# EAGLE board base-2u-rgb-led-driver (EAGLE 6.2)
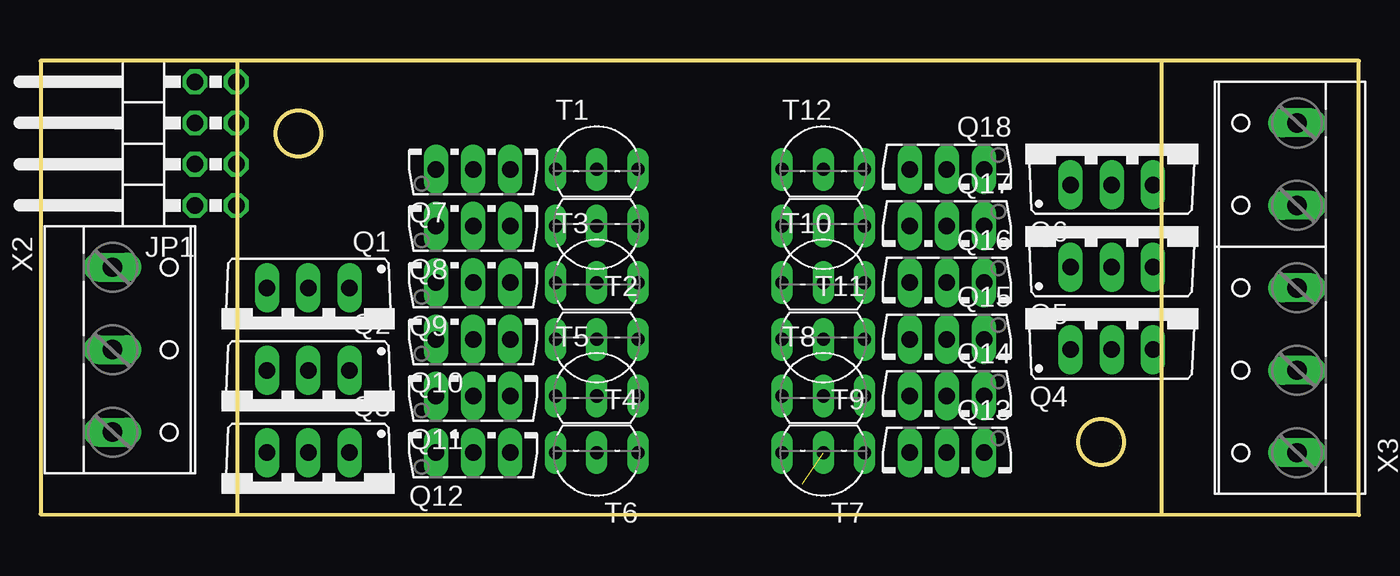
[diagram p0: board, top side]
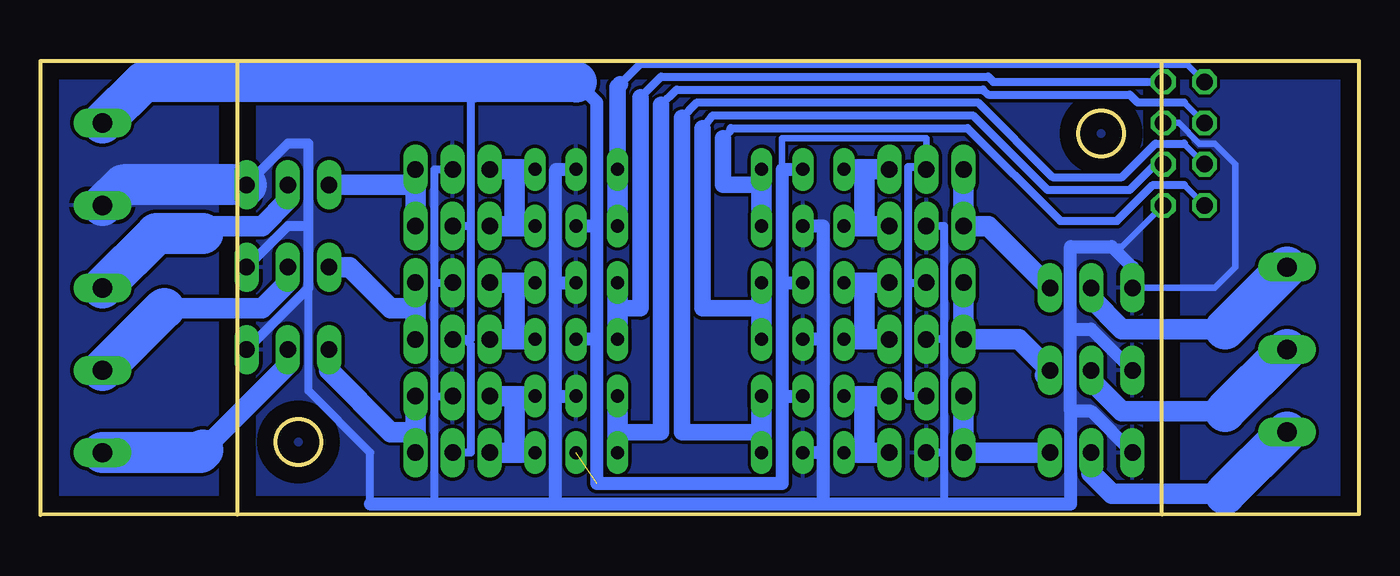
[diagram p1: board, bottom side, seen from below]

Size 81.28 x 27.98 mm. Coordinates in mm from the lower left corner, seen from the top.
Outline: 12.14,27.98 81.28,27.98 81.28,0 0,0.04 0,27.98 12.14,27.98
Outline: 12.14,0.03 12.14,27.98
Outline: 69.14,0.01 69.14,27.98
Outline: circle at 15.89,23.49 radius 1.4
Outline: circle at 65.39,4.49 radius 1.4
Copper layers (1*16): Top 0.035mm / dielectric 1.5mm / Bottom 0.035mm
Design rules: minimum track width 10mil, minimum drill 24mil, track to track 8mil, track to pad 8mil, pad to pad 8mil, via to via 8mil, smd to smd 8mil, copper to edge 40mil, drill to drill 8mil, minimum pad ring 10mil, minimum via ring 8mil, stop-mask expansion 4mil, vias tented up to drill 0mil, thermal gap 10mil

## Footprints (pad centres in the part's own frame; a part is rotated, then mirrored left to right if it is on the bottom)
2X04/90 = drill 1.016 octagon: 1 -3.81,-6.35; 2 -3.81,-3.81; 3 -1.27,-6.35; 4 -1.27,-3.81; 5 1.27,-6.35; 6 1.27,-3.81; 7 3.81,-6.35; 8 3.81,-3.81
TO220BV = drill 1.016 long: D 0,-2.54; G -2.54,-2.54; S 2.54,-2.54
TO126AV = drill 1.016 long: B 2.286,-1.27; C 0,-1.27; E -2.286,-1.27
TO92-ECB = drill 0.813 long: B 2.54,0; C 0,0; E -2.54,0
TO92-BCE = drill 0.813 long: B -2.54,0; C 0,0; E 2.54,0
W237-133 = drill 1.194 long: 1 -5.08,-0.635; 2 0,-0.635; 3 5.08,-0.635
W237-5P = drill 1.194 long: 1 -10.16,-0.635; 2 -5.08,-0.635; 3 0,-0.635; 4 5.08,-0.635; 5 10.16,-0.635

## Placement (x,y rotation side)
JP1  [2X04/90]  5.71,22.88 90 top
Q1  IRFZ44N  [TO220BV]  16.51,11.45 180 top
Q2  IRFZ44N  [TO220BV]  16.51,6.37 180 top
Q3  IRFZ44N  [TO220BV]  16.51,1.29 180 top
Q4  IRFZ44N  [TO220BV]  66.04,12.72 0 top
Q5  IRFZ44N  [TO220BV]  66.04,17.8 0 top
Q6  IRFZ44N  [TO220BV]  66.04,22.88 0 top
Q7  BD139  [TO126AV]  26.67,22.56 0 top
Q8  BD140  [TO126AV]  26.67,19.07 0 top
Q9  BD139  [TO126AV]  26.67,15.58 0 top
Q10  BD140  [TO126AV]  26.67,12.09 0 top
Q11  BD139  [TO126AV]  26.67,8.59 0 top
Q12  BD140  [TO126AV]  26.67,5.1 0 top
Q13  BD139  [TO126AV]  55.88,2.56 180 top
Q14  BD140  [TO126AV]  55.88,6.05 180 top
Q15  BD139  [TO126AV]  55.88,9.54 180 top
Q16  BD140  [TO126AV]  55.88,13.04 180 top
Q17  BD139  [TO126AV]  55.88,16.53 180 top
Q18  BD140  [TO126AV]  55.88,20.02 180 top
T1  [TO92-ECB]  34.29,21.29 0 top
T2  [TO92-BCE]  34.29,17.8 180 top
T3  [TO92-ECB]  34.29,14.31 0 top
T4  [TO92-BCE]  34.29,10.81 180 top
T5  [TO92-ECB]  34.29,7.32 0 top
T6  [TO92-BCE]  34.29,3.83 180 top
T7  [TO92-ECB]  48.26,3.83 180 top
T8  [TO92-BCE]  48.26,7.32 0 top
T9  [TO92-ECB]  48.26,10.81 180 top
T10  [TO92-BCE]  48.26,14.31 0 top
T11  [TO92-ECB]  48.26,17.8 180 top
T12  [TO92-BCE]  48.26,21.29 0 top
X2  [W237-133]  5.08,10.18 270 top
X3  [W237-5P]  76.83,13.99 90 top

## Library data of the parts
JP1 = pinhead
Q1-Q18 = transistor-power
T1-T12 = transistor
X2 X3 = con-wago-508; OC_FARNELL: unknown; OC_NEWARK: unknown

## Nets
B1: Q3.D X2.3
B2: Q6.D X3.3
DB1: Q11.B Q12.B T5.E T6.E
DB2: Q17.B Q18.B T11.E T12.E
DG1: Q9.B Q10.B T3.E T4.E
DG2: Q15.B Q16.B T9.E T10.E
DR1: Q7.B Q8.B T1.E T2.E
DR2: Q13.B Q14.B T7.E T8.E
G1: Q2.D X2.2
G2: Q5.D X3.2
GND: JP1.1 JP1.5 Q1.S Q2.S Q3.S Q4.S Q5.S Q6.S Q8.C Q10.C Q12.C Q14.C Q16.C Q18.C T2.C T4.C T6.C T8.C T10.C T12.C X3.4
IB1: JP1.4 T5.B T6.B
IB2: JP1.8 T11.B T12.B
IG1: JP1.3 T3.B T4.B
IG2: JP1.7 T9.B T10.B
IR1: JP1.2 T1.B T2.B
IR2: JP1.6 T7.B T8.B
N$1: Q1.G Q7.E Q8.E
N$2: Q4.G Q13.E Q14.E
N$3: Q2.G Q9.E Q10.E
N$5: Q3.G Q11.E Q12.E
N$7: Q5.G Q15.E Q16.E
N$8: Q6.G Q17.E Q18.E
R1: Q1.D X2.1
R2: Q4.D X3.1
VCC: Q7.C Q9.C Q11.C Q13.C Q15.C Q17.C T1.C T3.C T5.C T7.C T9.C T11.C X3.5

## Tracks (layer width: path | path; a pad name or v marks a point on that pad's centre or on a via)
B1
  Bottom 1.27: Q3.D 16.51,2.56 15.24,1.29 8.26,1.29
  Bottom 2.54: X2.3 8.26,1.29
B2
  Bottom 1.27: Q6.D 66.04,19.39 67.63,17.8 70.8,17.8 71.28,17.32
  Bottom 2.54: X3.3 74.14,17.32 71.28,17.32
DB1
  Bottom 1.27: 30.48,3.83 T6.E | 30.48,7.32 T5.E | 30.48,7.32 Q11.B | 30.48,3.83 30.48,7.32 | Q12.B 30.48,3.83
DB2
  Bottom 1.27: 52.07,21.29 Q18.B | T11.E 52.07,17.8 | 52.07,17.8 Q17.B | 52.07,21.29 T12.E | 52.07,17.8 52.07,21.29
DG1
  Bottom 1.27: Q10.B 30.48,10.81 | 30.48,10.81 T4.E | 30.48,14.31 T3.E | 30.48,14.31 Q9.B | 30.48,10.81 30.48,14.31
DG2
  Bottom 1.27: 52.07,14.31 T10.E | 52.07,14.31 Q16.B | 52.07,10.81 Q15.B | T9.E 52.07,10.81 | 52.07,10.81 52.07,14.31
DR1
  Bottom 1.27: 30.48,21.29 T1.E | 30.48,17.8 T2.E | 30.48,21.29 Q7.B | Q8.B 30.48,17.8 | 30.48,17.8 30.48,21.29
DR2
  Bottom 1.27: 52.07,7.32 T8.E | 52.07,7.32 Q14.B | T7.E 52.07,3.83 | 52.07,3.83 Q13.B | 52.07,3.83 52.07,7.32
G1
  Bottom 1.27: Q2.D 16.51,8.28 14.61,6.37 8.26,6.37
  Bottom 2.54: X2.2 8.26,6.37
G2
  Bottom 1.27: Q5.D 66.04,14.31 67.63,12.72 73.66,12.72
  Bottom 2.54: 73.66,12.72 X3.2
GND
  Bottom 0.406: Q1.S 8.89,13.99 7.62,15.26 7.62,21.61 8.89,22.88 9.84,22.88 11.11,24.15 JP1.5 | JP1.1 14.61,16.53 15.24,16.53
  Bottom 0.508: 25.56,3.83 Q12.C | 25.56,3.83 25.56,0.81 25.4,0.66 | 25.56,10.81 Q10.C | 25.56,3.83 25.56,10.81 | Q8.C 25.56,17.8 25.56,10.81 | 56.99,7.32 Q14.C | 56.99,0.66 56.99,7.32 | 56.99,14.31 Q16.C | 56.99,7.32 56.99,14.31 | Q18.C 56.99,21.29 56.99,14.31 | 64.77,13.99 64.77,7.64 60.96,3.83 60.96,0.66
  Bottom 0.61: Q4.S 64.77,13.99 64.77,17.8 | 64.77,17.8 64.77,22.88 66.04,22.88 Q6.S | Q5.S 66.04,17.8 64.77,17.8
  Bottom 0.813: 33.02,3.83 T6.C | 33.02,0.66 33.02,3.83 | 33.02,0.66 49.53,0.66 | 49.53,0.66 49.53,7.32 | 49.53,7.32 T8.C | 33.02,10.81 T4.C | 33.02,3.83 33.02,10.81 | T2.C 33.02,17.8 33.02,10.81 | Q1.S 13.97,15.26 15.24,16.53 17.78,16.53 17.78,11.45 | 17.78,6.37 17.78,11.45 | Q3.S 16.51,6.37 17.78,6.37 | Q2.S 16.51,11.45 17.78,11.45 | 17.78,6.37 17.78,0.66 25.4,0.66 33.02,0.66 | 49.53,14.31 T10.C | 49.53,7.32 49.53,14.31 | T12.C 49.53,21.29 49.53,14.31 | 49.53,0.66 55.88,0.66 56.99,0.66 60.96,0.66
  Bottom 2.54: Q6.S 76.2,20.34 X3.4
  pour Bottom: 0,27.96 0,0.02 81.28,0.02 81.28,27.96
IB1
  Bottom 0.406: JP1.4 10.79,22.88
  Bottom 0.508: 41.75,24.47 40.8,25.42 23.5,25.42 18.89,20.82 14.61,20.82 12.54,22.88 10.79,22.88
  Bottom 1.016: 41.75,24.47 41.75,5.1 36.83,5.1
  Bottom 1.27: T6.B 36.83,5.1 T5.B
IB2
  Bottom 0.406: JP1.8 10.64,27.8
  Bottom 0.508: 45.56,26.53 44.29,27.8 10.64,27.8 | T12.B
  Bottom 1.016: T12.B 45.72,26.37 45.56,26.53
  Bottom 1.27: T12.B T11.B
IG1
  Bottom 0.508: 40.48,23.83 39.85,24.63 23.81,24.63 19.21,20.02 14.13,20.02 12.54,21.61 JP1.3
  Bottom 1.016: 40.48,23.83 40.48,12.72 36.83,12.72
  Bottom 1.27: T4.B 36.83,12.72 T3.B
IG2
  Bottom 0.508: 44.29,25.74 43.02,27.01 22.86,27.01 22.54,26.69 JP1.7
  Bottom 1.016: 44.29,25.74 44.29,12.72 45.72,12.72
  Bottom 1.27: T9.B 45.72,12.72 T10.B
IR1
  Bottom 0.406: JP1.2 10.79,20.34
  Bottom 0.508: 39.21,23.2 38.73,23.67 38.73,23.83 24.13,23.83 18.41,18.12 14.92,18.12 12.7,20.34 10.79,20.34
  Bottom 1.016: 36.83,20.34 39.21,20.34 39.21,23.2
  Bottom 1.27: T2.B 36.83,20.34 T1.B
IR2
  Bottom 0.406: JP1.6 10.79,25.42
  Bottom 0.508: 43.02,25.26 42.07,26.21 23.18,26.21 22.86,25.9 14.13,25.9 13.65,25.42 10.79,25.42
  Bottom 1.016: 43.02,25.26 43.02,5.1 45.72,5.1
  Bottom 1.27: T7.B 45.72,5.1 T8.B
N$1
  Bottom 1.27: Q7.E Q8.E 22.86,17.8 Q1.G
N$2
  Bottom 1.27: Q13.E 58.17,5.1 | 58.17,5.1 Q14.E | Q4.G 63.5,8.91 59.69,5.1 58.17,5.1
N$3
  Bottom 1.27: Q9.E Q10.E 20.95,10.81 Q2.G 19.37,8.59
N$5
  Bottom 1.27: Q11.E Q12.E Q3.G
N$7
  Bottom 1.27: Q15.E 58.17,12.72 | 58.17,12.72 Q16.E | 58.17,12.72 59.69,12.72 62.23,15.26 Q5.G
N$8
  Bottom 1.27: Q17.E 58.17,20.34 | 58.17,20.34 Q18.E | 58.17,20.34 Q6.G
R1
  Bottom 1.27: Q1.D 16.51,13.36 14.61,11.45 8.26,11.45
  Bottom 2.54: X2.1 8.26,11.45
R2
  Bottom 1.27: Q4.D 66.04,9.23 71.28,3.99 | 71.28,3.99
  Bottom 2.54: 71.28,3.99 71.44,3.83 X3.1
VCC  (1 unrouted)
  Bottom 0.406: 35.56,21.29 35.56,23.2 26.67,23.2 Q7.C
  Bottom 0.508: 27.78,14.31 Q9.C | 27.78,14.31 27.78,21.45 26.83,21.45 Q7.C | Q11.C 27.78,7.32 27.78,14.31 | 54.77,17.8 Q17.C | 54.77,17.8 54.77,26.53 54.61,26.69 | 55.09,10.81 54.77,10.81 54.77,17.8 | 55.09,10.81 Q15.C | Q13.C 54.77,3.83 54.77,10.5 55.09,10.81
  Bottom 0.813: 46.99,10.81 T9.C | 46.99,10.81 46.99,1.92 35.56,1.92 35.56,7.32 | 35.56,7.32 T5.C | 35.56,14.31 T3.C | 35.56,14.31 35.56,7.32 | T1.C 35.56,21.29 35.56,14.31 | 46.99,17.8 T11.C | 46.99,10.81 46.99,17.8 | 48.26,26.69 46.99,25.42 46.99,17.8
  Bottom 2.54: X3.5 74.93,26.69 54.61,26.69 48.26,26.69

## Text on the board
Measures: 24.74 | 15.24 | 5.74 | 15.89 | 40.64 | 65.39